# Altium PCB mini_project_pcb.PcbDoc
Units mil, origin at the board's own origin, x right, y up, seen from the top; angles counter-clockwise.
Board outline 1910 x 2885 mil, 2 copper layers (Top Layer, Bottom Layer); 9 components, 8 nets, 27 pads, 3 vias.
Unrouted connection lines stored in the file: 1.
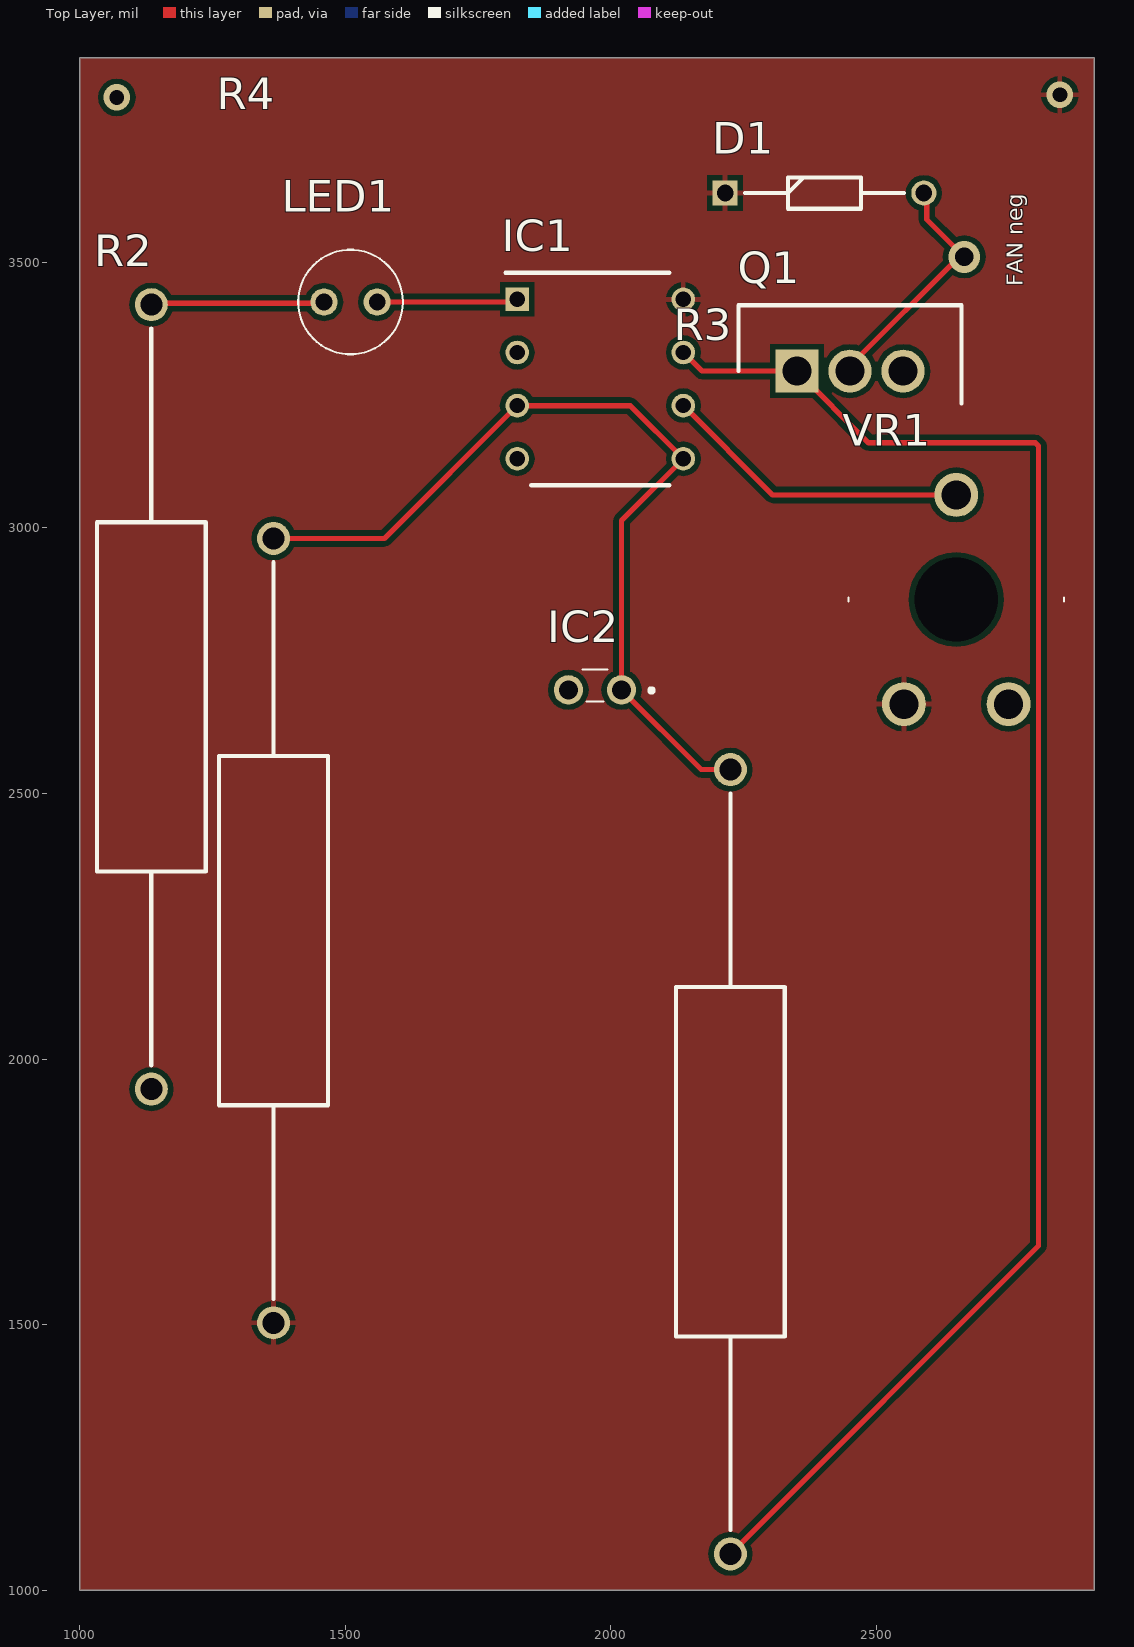
[diagram p0: Top Layer view]
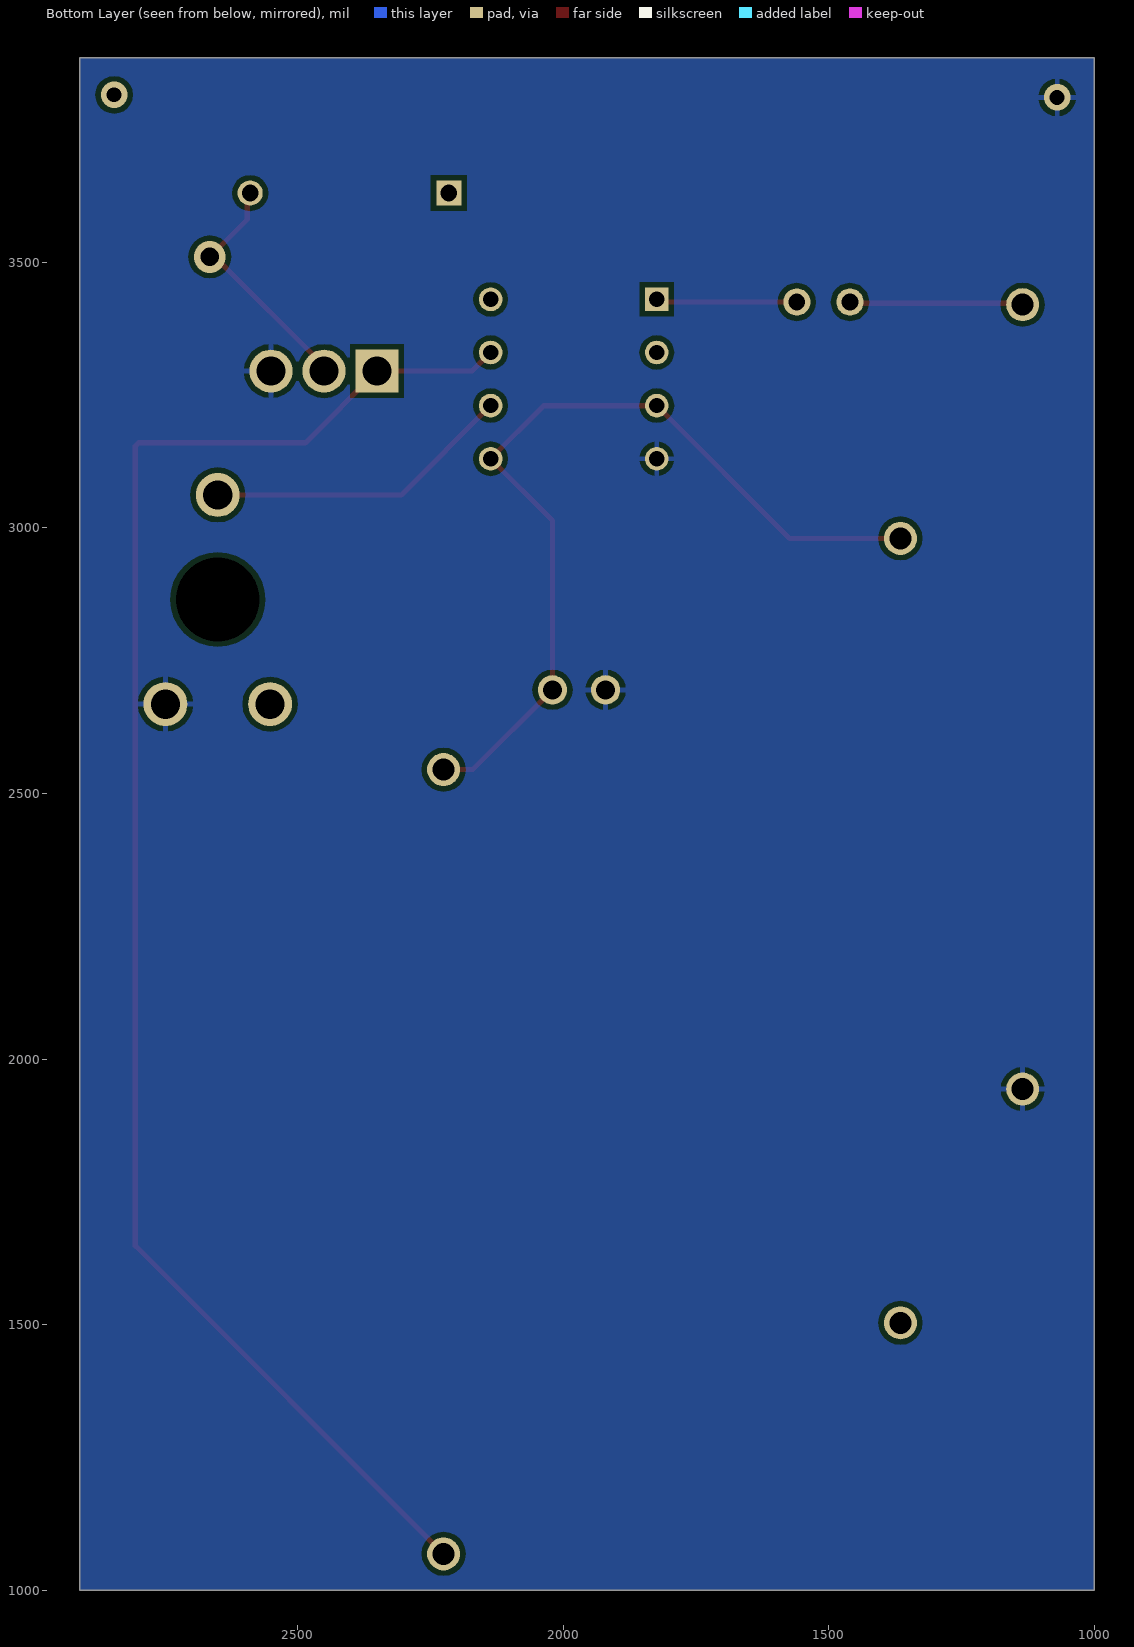
[diagram p1: Bottom Layer view, seen from below]
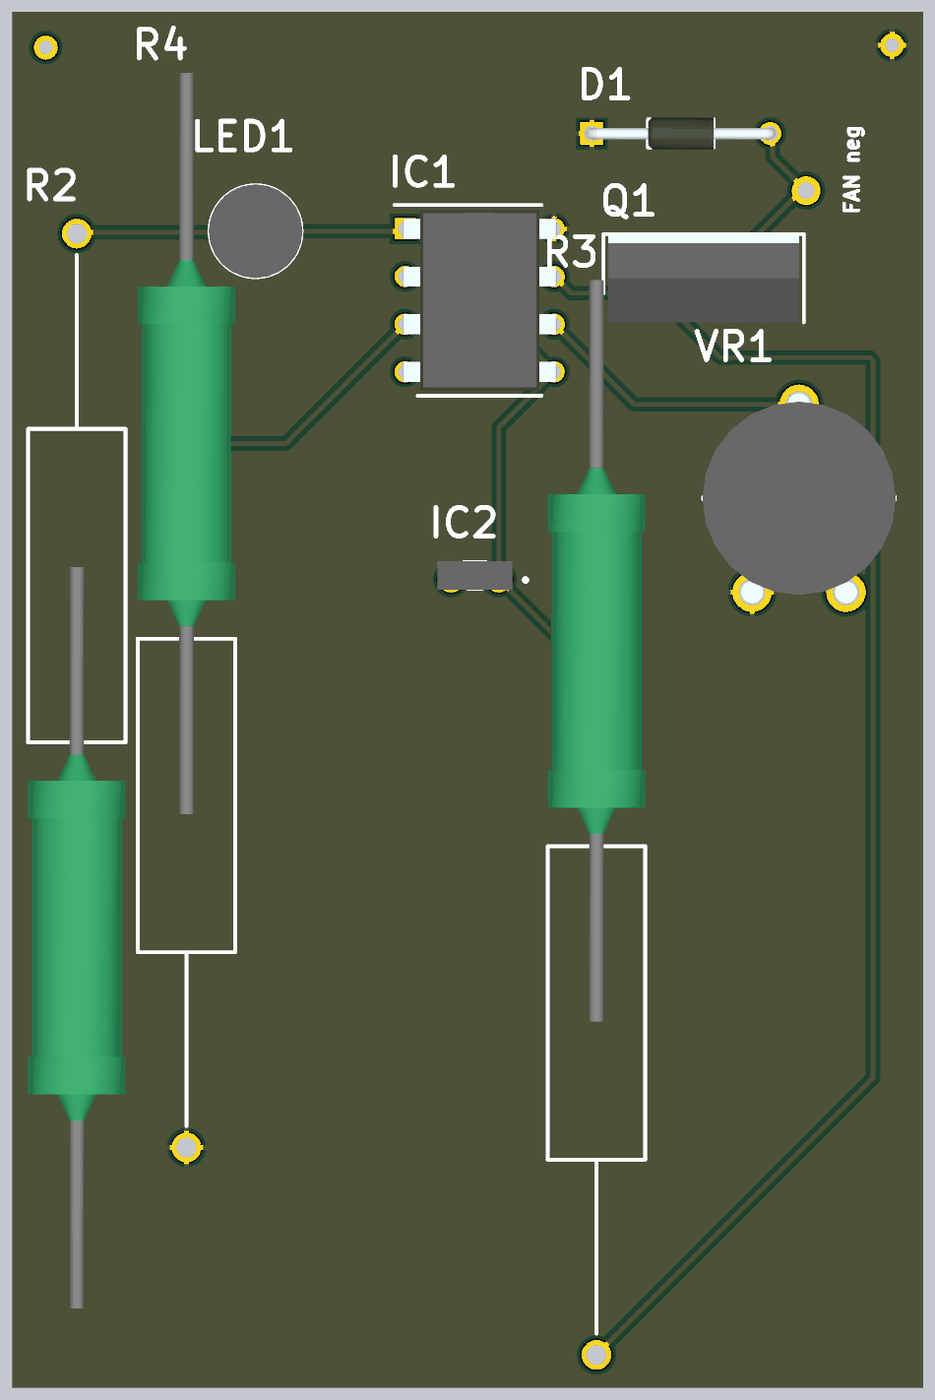
[diagram p2: 3D render of the assembled board from above, using the file's embedded part models]

## Layer stack, top to bottom
Top Solder: solder mask 0.4, Solder Resist, Dk 3.5
Top Layer: signal copper 1.4
Dielectric 1: dielectric 12.6, FR-4, Dk 4.8
Bottom Layer: signal copper 1.4
Bottom Solder: solder mask 0.4, Solder Resist, Dk 3.5

## Board outline
1000,1000 2910,1000 2910,3885 1000,3885

## Design rules (kind name [scope] priority, off if disabled: settings)
Clearance [All] p1: gap=10 ignorepadtopadclearanceinfootprint=FALSE except(0: Arc-Hole Track-Hole SMDPad-Hole THPad-Hole Via-Hole Fill-Hole Poly-Hole Region-Hole Text-Hole)
PolygonConnect [All] p1: connectstyle=Relief reliefconductorwidth=10 reliefentries=4 polygonreliefangle="90 Angle" airgapwidth=10
RoutingVias [All] p1: holewidth=28 width=50 viastyle="Through Hole" minholewidth=28 minwidth=50 maxholewidth=28 maxwidth=50
SolderMaskExpansion [All] p1: expansion=4 istentingtop=FALSE
Width [All] p1: maxlimit=10 minlimit=10 preferedwidth=10
30 further rules are at their usual default settings.

## Components (designator, comment, footprint, x,y, rotation, side; value= is the part's Value field where it differs from the comment)
D1 "Flyback diode" DIOAD950W60L350D150 2215,3630 r0 top
IC1 "LM358P" DIP794W53P254L959H508Q8N 1980,3280 r0 top
IC2 "TMP6131LPGM" LMT01QLPGQ1 2020,2473.35 r180 top
LED1 "LED" C543AWMNCCCKK141 1460,3425 r0 top
Q1 "NTP095N65S3HF" TO254P470X1016X2019-3P 2350.2,3295 r0 top
R2 "510" RESAD3750W83L1670D520 1135,1943.62 r90 top
R3 "510" RESAD3750W83L1670D520 2225,2545 r270 top
R4 "510" RESAD3750W83L1670D520 1365,2980 r270 top
VR1 "PT10LV10-224A2020-PM-S" PT10LV10224A2020PMS 2551.57,2668.15 r0 top

## Footprints (in the part's own frame and the unit in brackets; to place one, negate y for a bottom-side part, rotate by r counter-clockwise, add the part's x,y. Pads: shape width x height; smd on the part's side, far side on the other; paste and mask are expansions set on the pad)
C543AWMNCCCKK141 [mm]
  round 1.3 hole 0.8: 1(0,0) 2(2.54,0)
  silkscreen extent -1.23,-2.5 3.77,2.5, body extent -1.23,-2.5 3.77,2.5, height 8.8
DIOAD950W60L350D150 [mm]
  rect 1.2x1.2 hole 0.8: 1(0,0)
  round 1.2 hole 0.8: 2(9.5,0)
  silkscreen extent 0.95,-0.75 8.55,0.75, body extent -0.3,-0.85 9.8,0.85, height 1.69
DIP794W53P254L959H508Q8N [mm]
  rect 1.13x1.13 hole 0.73: 1(-3.97,3.81)
  round 1.13 hole 0.73: 2(-3.97,1.27) 3(-3.97,-1.27) 4(-3.97,-3.81) 5(3.97,-3.81) 6(3.97,-1.27) 7(3.97,1.27) 8(3.97,3.81)
  silkscreen extent -4.53,-5.08 3.3,5.08, body extent -4.1,-4.79 4.1,4.79, height 5.08
LMT01QLPGQ1 [mm]
  round 1.4 hole 0.9: 1(0,-5.63) 2(2.54,-5.63)
  silkscreen extent -1.53,-6.6 1.87,-5.08, body extent -0.73,-6.6 3.27,-5.08, height 5.4
PT10LV10224A2020PMS [mm]
  round 2.1 hole 1.4: 1(0,0) 2(2.5,10) 3(5,0)
  round 2 hole 4 unplated: MH1(2.5,5)
  silkscreen extent -2.65,4.9 7.65,5.1, body extent -2.65,-0.6 7.65,10.6, height 4.9
RESAD3750W83L1670D520 [mm]
  round 1.575 hole 1.05: 1(0,0) 2(37.5,0)
  silkscreen extent 1.14,-2.6 36.36,2.6, body extent -19.75,-2.59 19.75,2.59, height 2.6
TO254P470X1016X2019-3P [mm]
  rect 2.055x2.055 hole 1.37: 1(0,0)
  round 2.055 hole 1.37: 2(2.535,0) 3(5.07,0)
  silkscreen extent -2.8,-1.55 7.87,3.15, body extent -2.55,-1.55 7.61,3.15, height 18.54

## Part data
D1: library part SD101A-TR, "SD101A-TR", Manufacturer_Name=Vishay, Datasheet Link=https://componentsearchengine.com/Datasheets/5/SD101A-TR.pdf, Manufacturer_Part_Number=SD101A-TR
IC1: "Integrated Circuit", Manufacturer_Name="Texas Instruments", Mouser2 Part Number=595-LM358P, Datasheet Link=http://www.ti.com/lit/ds/symlink/lm358a.pdf, Height=5.08mm, Manufacturer_Part_Number=LM358P, Mouser2 Price/Stock=https://www.mouser.com/Search/Refine.aspx?Keyword=595-LM358P
IC2: "Integrated Circuit", Manufacturer_Name="Texas Instruments", Datasheet Link=https://www.ti.com/lit/gpn/TMP61, Height=5.3mm, Manufacturer_Part_Number=TMP6131LPGM
LED1: library part C543A-WMN-CCCKK141, "C543A-WMN-CCCKK141", Manufacturer_Name=Cree, Mouser2 Part Number=941-C543AWMNCCCKK141, Datasheet Link=https://componentsearchengine.com//C543A-WMN-CCCKK141.pdf, Height=8.7mm, Manufacturer_Part_Number=C543A-WMN-CCCKK141, Mouser2 Price/Stock=https://www.mouser.com/Search/Refine.aspx?Keyword=941-C543AWMNCCCKK141
Q1: "MOSFET (N-Channel)", Manufacturer_Name="ON Semiconductor", Mouser2 Part Number=863-NTP095N65S3HF, Datasheet Link=https://componentsearchengine.com//NTP095N65S3HF.pdf, Height=4.7mm, Manufacturer_Part_Number=NTP095N65S3HF, Mouser2 Price/Stock=https://www.mouser.com/Search/Refine.aspx?Keyword=863-NTP095N65S3HF
R2 R3 R4: library part PR03000205100JAC00, "PR03000205100JAC00", Manufacturer_Name=Vishay, Datasheet Link=http://www.vishay.com/docs/28729/pr010203.pdf, Manufacturer_Part_Number=PR03000205100JAC00
VR1: "Variable Resistor", Manufacturer_Name=PIHER, Mouser2 Part Number=531-PT1LV1224A22PMS, Datasheet Link=https://componentsearchengine.com//PT10LV10-224A2020-PM-S.pdf, Height=4.8mm, Manufacturer_Part_Number=PT10LV10-224A2020-PM-S, Mouser2 Price/Stock=https://www.mouser.com/Search/Refine.aspx?Keyword=531-PT1LV1224A22PMS

## Via types
v1: diameter 50, hole 28, Top Layer to Bottom Layer, 2 vias
v2: diameter 60, hole 35, Top Layer to Bottom Layer, 1 vias

## Nets (pads, with @x,y where several pads share a name; then routed paths per layer and width w, separated by ;. In a path a pad name is that pad's centre, name@x,y a point inside that pad or via, vN(x,y) a via of type N, cw(c..) or ccw(c..) an arc to the next point about the centre after c; other vN are vias at no path point)
GND: IC1.4 IC2.2 Q1.3 R2.1 VR1.3
  other v1: 1070,3810
NetD1_1: D1.1 IC1.8 R4.2 VR1.1 | length 3.5
  Top Layer w10: IC1.8 IC1.8@2138.8,3427.5
  other v1: 2845,3815
NetD1_2: D1.2 Q1.2 | length 461.4
  Top Layer w10: Q1.2 2450,3305 2655,3510 v2(2665,3510) 2594.45,3580.55 2594.45,3624.57 D1.2
NetIC1_1: IC1.1 IC1.2 LED1.2 | length 265.8
  Top Layer w10: LED1.2 1818.7,3425 IC1.1
NetIC1_3: IC1.3 IC1.5 IC2.1 R3.1 R4.1 | length 1666.6
  Top Layer w10: R4.1 1573.7,2980 IC1.3 2036.3,3230 IC1.5 2020,3013.7 IC2.1 2170,2545 R3.1
NetIC1_6: IC1.6 VR1.2 | length 583.4
  Top Layer w10: IC1.6 2304.45,3061.85 VR1.2
NetIC1_7: IC1.7 Q1.1 R3.2 | length 3067.3
  Top Layer w10: IC1.7 2171.3,3295 Q1.1 2485.2,3160 2799.14,3160 2805,3154.14 2805,1648.62 R3.2
NetLED1_1: LED1.1 R2.2 | length 327.1
  Top Layer w10: R2.2 1137.5,3422.5 1457.5,3422.5 LED1.1
pads on no net: VR1.MH1

## Polygon pours and split planes (outlines as drawn)
NetD1_1 on Top Layer "NETD1_1_L01_P005" (solid, pour order 5): 2910,1000 2910,3885 1000,3885 1000,1000
NetIC1_7 on Top Layer "NETIC1_7_L01_P004" (solid, pour order 4): 3425,2675
no net on Top Layer "NONET_L01_P000" (solid, pour order 0): 870,3855
GND on Bottom Layer "GND_L02_P002" (solid, pour order 2): 1000,3885 2910,3885 2910,1000 1000,1000

## Silkscreen, mask and mechanical layers (free items; w line width, h text height)
Top Overlay:
  text "FAN neg" at 2775,3455 h30 r90